# Altium PCB Bela_fan_control.PcbDoc
Units mil, origin at the board's own origin, x right, y up, seen from the top; angles counter-clockwise.
Board outline 760 x 1130 mil, 2 copper layers (Top Layer, Bottom Layer), stack 61.855 mil thick; 16 components, 21 nets, 72 pads, 0 vias.
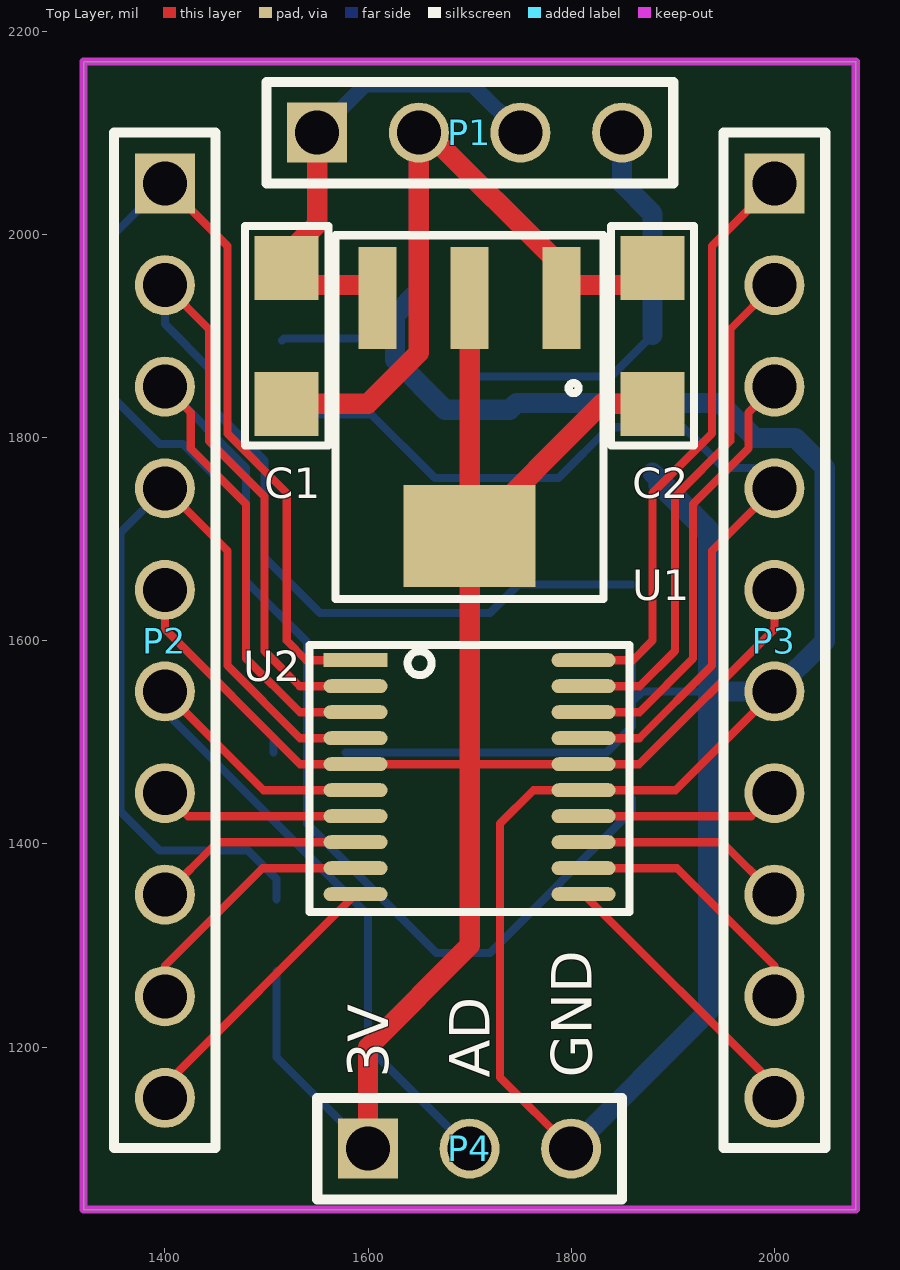
[diagram p0: Top Layer view]
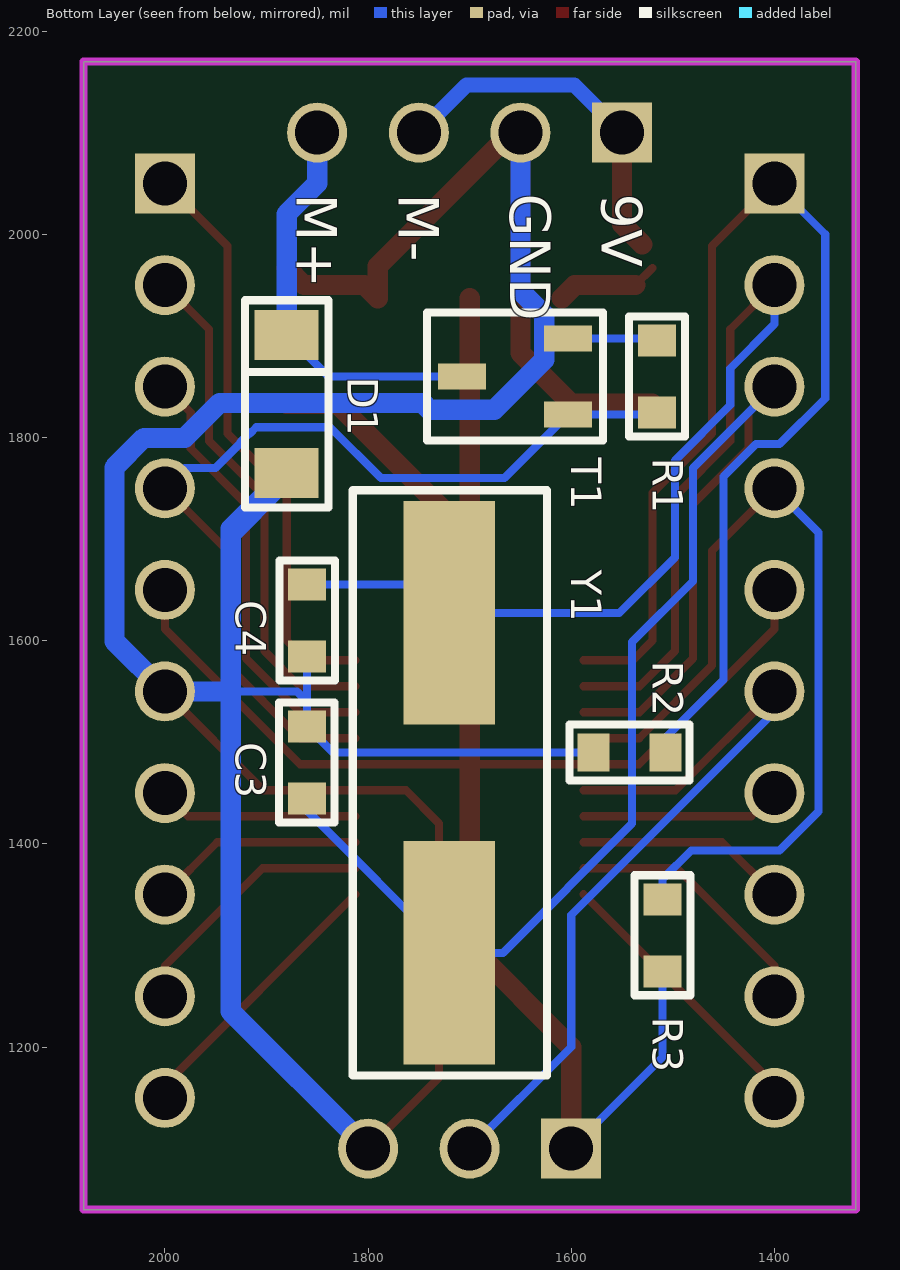
[diagram p1: Bottom Layer view, seen from below]

## Layer stack, top to bottom
Top Solder: solder mask 0.4, Solder Resist, Dk 3.5
Top Layer: signal copper 1.4
Dielectric1: core 59.0551, FR-4, Dk 4.2
Bottom Layer: signal copper 1.4
Bottom Solder: solder mask 0.4, Solder Resist, Dk 3.5

## Board outline
1320,1040 2080,1040 2080,2170 1320,2170

## Design rules (kind name [scope] priority, off if disabled: settings)
AssemblyTestPointUsage AssemblyTestPointUsage_1 [All] p1:
AssemblyTestPointUsage [All] p2:
AssemblyTestpoint AssemblyTestpoint_1 [All] p1: testpointundercomponent=TRUE minsize=40 maxsize=100 preferedsize=60 minholesize=0 maxholesize=40 preferedholesize=32 testpointgrid=1 usegrid=TRUE gridtolerance=0.01 allowsidetop=TRUE allowsidebottom=TRUE
AssemblyTestpoint [All] p2: testpointundercomponent=TRUE minsize=40 maxsize=100 preferedsize=60 minholesize=0 maxholesize=40 preferedholesize=32 testpointgrid=1 usegrid=TRUE gridtolerance=0.01 allowsidetop=TRUE allowsidebottom=TRUE
Clearance Clearance_to_ftdi_1 [InComponent('U1')] p1: gap=8
Clearance Clearance_1 [All] p2: gap=10
Clearance Clearance_to_ftdi [InComponent('U1')] p3: gap=8
Clearance [All] p4: gap=10
ComponentClearance ComponentClearance_1 [All] p1: gap=10 collisioncheckmode=3 verticalgap=10 showdistances=FALSE
ComponentClearance [All] p2: gap=10 collisioncheckmode=3 verticalgap=10 showdistances=FALSE
DiffPairsRouting DiffPairsRouting_1 [All] p1: maxlimit=10 minlimit=10 mostfreqgap=10 toplayer_minwidth=15 toplayer_maxwidth=15 toplayer_prefwidth=15 bottomlayer_minwidth=15 bottomlayer_maxwidth=15 bottomlayer_prefwidth=15 maxuncoupledlength=500
DiffPairsRouting [All] p2: maxlimit=10 minlimit=10 mostfreqgap=10 toplayer_minwidth=15 toplayer_maxwidth=15 toplayer_prefwidth=15 bottomlayer_minwidth=15 bottomlayer_maxwidth=15 bottomlayer_prefwidth=15 maxuncoupledlength=500
FabricationTestPointUsage FabricationTestPointUsage_1 [All] p1: valid=0 allowmultiple=FALSE
FabricationTestPointUsage [All] p2: valid=0 allowmultiple=FALSE
FabricationTestpoint FabricationTestpoint_1 [All] p1: side=3 testpointundercomponent=TRUE minsize=40 maxsize=100 preferedsize=60 minholesize=0 maxholesize=40 preferedholesize=32 testpointgrid=1 allowsidetop=TRUE allowsidebottom=TRUE usegrid=TRUE gridtolerance=0.01
FabricationTestpoint [All] p2: side=3 testpointundercomponent=TRUE minsize=40 maxsize=100 preferedsize=60 minholesize=0 maxholesize=40 preferedholesize=32 testpointgrid=1 allowsidetop=TRUE allowsidebottom=TRUE usegrid=TRUE gridtolerance=0.01
FanoutControl Fanout_Default_1 [All] p1: bgadir=Out bgaviamode=Centered fanoutstyle=Auto fanoutdirection=Alternating viagrid=1 // Fanout_Default (Default Rule)
FanoutControl Fanout_Small_1 [(CompPinCount < 5)] p2: bgadir=Out bgaviamode=Centered fanoutstyle=Auto fanoutdirection=OutThenIn viagrid=1 // Fanout_Small (Default Rule)
FanoutControl Fanout_SOIC_1 [IsSOIC] p3: bgadir=Out bgaviamode=Centered fanoutstyle=Auto fanoutdirection=Alternating viagrid=1 // Fanout_SOIC (Default Rule)
FanoutControl Fanout_LCC_1 [IsLCC] p4: bgadir=Out bgaviamode=Centered fanoutstyle=Auto fanoutdirection=Alternating viagrid=1 // Fanout_LCC (Default Rule)
FanoutControl Fanout_BGA_1 [IsBGA] p5: bgadir=Out bgaviamode=Centered fanoutstyle=Auto fanoutdirection=Alternating viagrid=1 // Fanout_BGA (Default Rule)
FanoutControl Fanout_BGA [IsBGA] p6: bgadir=Out bgaviamode=Centered fanoutstyle=Auto fanoutdirection=Alternating viagrid=1 // Fanout_BGA (Default Rule)
FanoutControl Fanout_LCC [IsLCC] p7: bgadir=Out bgaviamode=Centered fanoutstyle=Auto fanoutdirection=Alternating viagrid=1 // Fanout_LCC (Default Rule)
FanoutControl Fanout_SOIC [IsSOIC] p8: bgadir=Out bgaviamode=Centered fanoutstyle=Auto fanoutdirection=Alternating viagrid=1 // Fanout_SOIC (Default Rule)
FanoutControl Fanout_Small [(CompPinCount < 5)] p9: bgadir=Out bgaviamode=Centered fanoutstyle=Auto fanoutdirection=OutThenIn viagrid=1 // Fanout_Small (Default Rule)
FanoutControl Fanout_Default [All] p10: bgadir=Out bgaviamode=Centered fanoutstyle=Auto fanoutdirection=Alternating viagrid=1 // Fanout_Default (Default Rule)
Height Height_1 [All] p1: minheight=0 maxheight=1000 prefheight=500
Height [All] p2: minheight=0 maxheight=1000 prefheight=500
HoleSize HoleSize_1 [All] p1: absolutevalues=TRUE maxlimit=196.85 minlimit=0.98 maxpercent=80.000 minpercent=20.000
HoleSize [All] p2: absolutevalues=TRUE maxlimit=196.85 minlimit=0.98 maxpercent=80.000 minpercent=20.000
HoleToHoleClearance HoleToHoleClearance_1 [All] p1: gap=10 allowstackedmicrovias=TRUE
HoleToHoleClearance [All] p2: gap=10 allowstackedmicrovias=TRUE
LayerPairs LayerPairs_1 [All] p1: enforce=TRUE
LayerPairs [All] p2: enforce=TRUE
MinimumSolderMaskSliver MinimumSolderMaskSliver_to_ftdi_1 [InComponent('U1')   or InComponent('SW1') vs InComponent('U1')   or InComponent('SW1')] p1: minsoldermaskwidth=1
MinimumSolderMaskSliver MinimumSolderMaskSliver_1 [All] p2: minsoldermaskwidth=10
MinimumSolderMaskSliver MinimumSolderMaskSliver_to_ftdi [InComponent('U1')   or InComponent('SW1') vs InComponent('U1')   or InComponent('SW1')] p3: minsoldermaskwidth=1
MinimumSolderMaskSliver [All] p4: minsoldermaskwidth=10
NetAntennae NetAntennae_1 [All] p1: netantennaetolerance=0
NetAntennae [All] p2: netantennaetolerance=0
PasteMaskExpansion PasteMaskExpansion_1 [All] p1: expansion=0
PasteMaskExpansion [All] p2: expansion=0
PlaneClearance PlaneClearance_1 [All] p1: clearance=20
PlaneClearance [All] p2: clearance=20
PlaneConnect PlaneConnect_1 [All] p1: planeconnectstyle=Relief reliefexpansion=20 reliefentries=4 reliefconductorwidth=10 reliefairgap=10
PlaneConnect [All] p2: planeconnectstyle=Relief reliefexpansion=20 reliefentries=4 reliefconductorwidth=10 reliefairgap=10
PolygonConnect PolygonConnect_1 [All] p1: connectstyle=Relief reliefconductorwidth=10 reliefentries=4 polygonreliefangle="90 Angle" airgapwidth=10
PolygonConnect [All] p2: connectstyle=Relief reliefconductorwidth=10 reliefentries=4 polygonreliefangle="90 Angle" airgapwidth=10
RoutingCorners RoutingCorners_1 [All] p1: cornerstyle=45-Degree minsetback=100 maxsetback=100
RoutingCorners [All] p2: cornerstyle=45-Degree minsetback=100 maxsetback=100
RoutingLayers RoutingLayers_1 [All] p1: top layer_v5=TRUE bottom layer_v5=TRUE
RoutingLayers [All] p2: top layer_v5=TRUE bottom layer_v5=TRUE
RoutingPriority RoutingPriority_1 [All] p1: routingpriority=0
RoutingPriority [All] p2: routingpriority=0
RoutingTopology RoutingTopology_1 [All] p1: topology=Shortest
RoutingTopology [All] p2: topology=Shortest
RoutingVias RoutingVias_1 [All] p1: holewidth=28 width=50 viastyle="Through Hole" minholewidth=28 minwidth=50 maxholewidth=28 maxwidth=50
RoutingVias [All] p2: holewidth=28 width=50 viastyle="Through Hole" minholewidth=28 minwidth=50 maxholewidth=28 maxwidth=50
ShortCircuit ShortCircuit_1 [All] p1: allowed=FALSE
ShortCircuit [All] p2: allowed=FALSE
SilkToBoardRegionClearance SilkToBoardRegionClearance_1 [All] p1:
SilkToBoardRegionClearance [All] p2:
SilkToSilkClearance SilkToSilkClearance_1 [All] p1: silktosilkclearance=0
SilkToSilkClearance [All] p2: silktosilkclearance=0
SilkToSolderMaskClearance SilkToSolderMaskClearance_1 [IsPad] p1: minsilkscreentomaskgap=0 clearancetoexposedcopper=TRUE
SilkToSolderMaskClearance [IsPad] p2: minsilkscreentomaskgap=0 clearancetoexposedcopper=TRUE
SolderMaskExpansion SolderMaskExpansion_1 [All] p1: expansion=4
SolderMaskExpansion [All] p2: expansion=4
UnRoutedNet UnRoutedNet_1 [All] p1:
UnRoutedNet [All] p2:
UnpouredPolygon UnpouredPolygon_1 [All] p1:
UnpouredPolygon [All] p2:
Width Width_1 [All] p1: maxlimit=100 minlimit=8 preferedwidth=10
Width [All] p2: maxlimit=100 minlimit=8 preferedwidth=10

## Components (designator, comment, footprint, x,y, rotation, side; value= is the part's Value field where it differs from the comment)
C1 "10uF" FP_1206_CAP_085 1520,1900 r90 top
C2 "10uF" FP_1206_CAP_085 1880,1900 r270 top
C3 "20pF" FP_0603_CAP_080 1860,1480 r270 bottom
C4 "20pF" FP_0603_CAP_080 1860,1620 r90 bottom
D1 "TMMBAT46" SOD-80 1880,1833.07 r180 bottom
P1 "Header 1X4" HEADER_2.54MM_M_1x4 1700,2100 r0 top
P2 "Header 1X10" HEADER_2.54MM_M_1x10 1400,1600 r270 top
P3 "Header 1X10" HEADER_2.54MM_M_1x10 2000,1600 r270 top
P4 "Header 1X3" HEADER_2.54MM_M_1x3 1700,1100 r0 top
R1 "1K" FP_0603_RES 1515.43,1860 r90 bottom
R2 "1K" FP_0603_RES 1542.52,1490 r0 bottom
R3 "1K" FP_0603_RES 1510,1310 r270 bottom
T1 "NCE6003" FET_SOT23 1655.43,1860 r180 bottom
U1 "LD1117xx" SUPPLY_SOT223 1700,1820 r270 top
U2 "STM32F030F4P6" uC_TSSOP20 1700,1440 r0 top
Y1 "8MHz" FP_CRYSTAL_HC49_SMD 1720,1460 r270 bottom

## Footprints (in the part's own frame and the unit in brackets; to place one, negate y for a bottom-side part, rotate by r counter-clockwise, add the part's x,y. Pads: shape width x height; smd on the part's side, far side on the other; paste and mask are expansions set on the pad)
FET_SOT23 [mm] "SOT23-3 tok"
  rect 1.2x0.65 smd: D(-1.327,0) G(1.327,-0.95) S(1.327,0.95)
  silkscreen extent -2.2,-1.6 2.2,1.6, body extent -1.27,-1.46 1.27,1.46, height 0.97
FP_0603_CAP_080 [mm] "0.8mm magas 0603 kapacitás"
  rect 0.8x0.95 smd: 1(-0.9,0) 2(0.9,0)
  silkscreen extent -1.5,-0.7 1.5,0.69, body extent -0.8,-0.4 0.76,0.4, height 0.8
FP_0603_RES [mm] "0603 ellenállás"
  rect 0.8x0.95 smd: 1(-0.9,0) 2(0.9,0)
  silkscreen extent -1.5,-0.7 1.5,0.7, body extent -0.8,-0.4 0.8,0.4, height 0.44
FP_1206_CAP_085 [mm] "1206 kapacitás 0.85 mm"
  rect 1.6x1.6 smd: 1(-1.7,0) 2(1.7,0)
  silkscreen extent -2.74,-1.04 2.74,1.04, body extent -1.52,-0.79 1.58,0.79, height 0.85
FP_CRYSTAL_HC49_SMD [mil] "HC49/SMD"
  rect 220x90 smd: 1(-167.32,0) 2(167.32,0)
  silkscreen extent -288,-95 288,96, body extent -249,-90 240,90, height 130
HEADER_2.54MM_M_1x3 [mm] "3×1 tüskesor"
  rect 1.5x1.5 hole 1.1: 1(-2.54,0)
  round 1.5 hole 1.1: 2(0,0) 3(2.54,0)
  silkscreen extent -3.81,-1.27 3.81,1.27, body extent -3.78,-1.27 3.79,1.27, height 8.54
HEADER_2.54MM_M_1x4 [mm] "4×1 tüskesor"
  rect 1.5x1.5 hole 1.1: 1(-3.81,0)
  round 1.5 hole 1.1: 2(-1.27,0) 3(1.27,0) 4(3.81,0)
  silkscreen extent -5.08,-1.27 5.09,1.27, body extent -5.05,-1.27 5.06,1.27, height 8.54
HEADER_2.54MM_M_1x10 [mm] "2×1 tüskesor"
  rect 1.5x1.5 hole 1.1: 1(-11.43,0)
  round 1.5 hole 1.1: 2(-8.89,0) 3(-6.35,0) 4(-3.81,0) 5(-1.27,0) 6(1.27,0) 7(3.81,0) 8(6.35,0) 9(8.89,0) 10(11.43,0)
  silkscreen extent -12.7,-1.27 12.68,1.27, body extent -12.67,-1.27 12.68,1.27, height 8.54
SOD-80 [mm]
  rect 1.6x1.25 smd: A(0,-1.725) K(0,1.725)
  silkscreen extent -1.04,-2.59 1.04,2.59, body extent -0.79,-1.85 0.81,1.85, height 1.61
SUPPLY_SOT223 [mm] "SOT223 package, 3 leads"
  rect 2.55x0.95 smd: 1(-2.975,2.3) 2(-2.975,0) 3(-2.975,-2.3)
  rect 2.55x3.3 smd: 2(2.975,0)
  silkscreen extent -4.55,-3.35 4.55,3.35, body extent -3.5,-3.25 3.5,3.25, height 1.65
uC_TSSOP20 [mm]
  rect 1.6x0.35 smd: 1(-2.85,3.575)
  oval 1.6x0.35 smd: 2(-2.85,2.925) 3(-2.85,2.275) 4(-2.85,1.625) 5(-2.85,0.975) 6(-2.85,0.325) 7(-2.85,-0.325) 8(-2.85,-0.975) 9(-2.85,-1.625) 10(-2.85,-2.275) 11(2.85,-2.275) 12(2.85,-1.625) 13(2.85,-0.975) 14(2.85,-0.325) 15(2.85,0.325) 16(2.85,0.975) 17(2.85,1.625) 18(2.85,2.275) 19(2.85,2.925) 20(2.85,3.575)
  silkscreen extent -4,-2.72 4,3.95, body extent -3.1,-2.72 3.18,3.78, height 1.09

## Part data
C1 C2: library part Cap, "Capacitor ceramic X7R"
C3 C4: library part Cap, "Capacitor"
D1: library part DIODE_big
P1: "Header, 4-Pin"
P2 P3: "Header, 10-Pin"
P4: "Header, 3-Pin"
R1 R2 R3: library part RES, "Resistor"
T1: library part NMOS, "N Channel 60V 3A 2V @ 250uA 105 m? @ 3A,10V 1.7W SOT-23(SOT-23-3) MOSFET RoHS"
U1: "LD1117xx 3,3V lin reg"
Y1: library part XTAL, "Quartz"

## Nets (pads, with @x,y where several pads share a name; then routed paths per layer and width w, separated by ;. In a path a pad name is that pad's centre, name@x,y a point inside that pad or via, vN(x,y) a via of type N, cw(c..) or ccw(c..) an arc to the next point about the centre after c; other vN are vias at no path point)
3V3: C2.2 P2.5 P3.5 P4.1 R3.2 U1.2 U2.5 U2.16 | length 2051.5
  Top Layer w8: 1400,1620 1400,1611.56 1533.17,1478.39 U2.5 1700,1478.39 U2.16 1866.83,1478.39 2000,1611.56 2000,1620
  Top Layer w20: P4.1 1600,1200 1700,1300 1700,1478.39 U1.2@1700,1702.87 ; U1.2@1700,1937.13 U1.2@1700,1702.87 ; C2.2 1830.2,1833.07 U1.2@1700,1702.87
  Bottom Layer w8: R3.2 1510,1190 P4.1
9V: C1.2 P1.1 P1.3 U1.3 | length 439
  Top Layer w8: C1.2 C1.2@1536.93,1950
  Top Layer w20: C1.2@1530,1990 1550,2010 P1.1@1550,2080 ; C1.2@1536.93,1950 1596.57,1950 U1.3
  Bottom Layer w15: P1.1 1597.03,2147.03 1702.97,2147.03 P1.3
A/D: P2.6 P4.2 U2.6 | length 802.3
  Top Layer w8: P2.6 1497.2,1452.8 U2.6
  Bottom Layer w8: P2.6 1400,1530 1600,1330 1600,1200 P4.2
BOOT0: P2.1 R2.1 U2.1 | length 1234.8
  Top Layer w8: P2.1 1461.53,1988.47 1461.53,1803.93 1520,1745.46 1520,1600 1539.25,1580.75 U2.1
  Bottom Layer w8: P2.1 1350,2000 1350,1838.44 1394.92,1793.53 1418.03,1793.53 1450,1761.56 1450,1561.56 1507.09,1504.47 R2.1
GND: C1.1 C2.1 C3.1 C4.1 D1.A P1.2 P3.6 P4.3 R1.2 R2.2 T1.S U1.1 U2.15 | length 3742.7
  Top Layer w8: P1.2@1650,2080 P1.2 ; P4.3 1730,1170 1730,1420 1762.8,1452.8 U2.15 1902.8,1452.8 P3.6
  Top Layer w20: C1.1 1599.75,1833.07 1650,1883.32 P1.2@1650,2077.68 ; P1.2 1659,2100 1790.55,1968.45 U1.1 1803.43,1950 1863.07,1950 C2.1
  Bottom Layer w8: R1.2 1517.4,1897.4 T1.S ; R2.2 1834.57,1490 C3.1 1860,1540 ; C4.1 1860,1540 ; D1.A 1880,1751.46 1935,1696.46 ; 1935,1550 1870,1550 1860,1540
  Bottom Layer w20: P1.2 1650,1944.21 1626.59,1920.81 1626.59,1876.38 1675.77,1827.2 1739.58,1827.2 1746.38,1834 1945.96,1834 1980.43,1799.53 2020.52,1799.53 2049.53,1770.51 2049.53,1599.53 P3.6 1935,1550 ; P4.3 1935,1235 1935,1550 ; D1.A 1935,1710.16 1935,1696.46 1935,1550
NetD1_K: D1.K P1.4 T1.D | length 400.7
  Bottom Layer w8: T1.D 1839.02,1860 D1.K
  Bottom Layer w20: P1.4 1850,2050 1880,2020 D1.K
NetP2_7: P2.7 U2.7 | length 197.2
  Top Layer w8: P2.7 1422.8,1427.2 U2.7
NetP2_8: P2.8 U2.8 | length 209.2
  Top Layer w8: P2.8 1451.61,1401.61 U2.8
NetP2_9: P2.9 U2.9 | length 257.6
  Top Layer w8: P2.9 1400,1280 1496.02,1376.02 U2.9
NetP2_10: P2.10 U2.10 | length 278.2
  Top Layer w8: P2.10 1400,1162.64 U2.10
NetP3_1: P3.1 U2.20 | length 575.5
  Top Layer w8: U2.20 1860.75,1580.75 1880,1600 1880,1745.46 1938.47,1803.93 1938.47,1988.47 P3.1
NetP3_2: P3.2 U2.19 | length 504.9
  Top Layer w8: U2.19 1867.23,1555.16 1902,1589.92 1902,1742 1956.47,1796.47 1956.47,1906.47 P3.2
NetP3_3: P3.3 U2.18 | length 430.4
  Top Layer w8: U2.18 1867.1,1529.57 1920,1582.47 1920,1734.54 1974.47,1789.02 1974.47,1824.47 P3.3
NetP3_7: P3.7 U2.14 | length 197.2
  Top Layer w8: U2.14 1977.2,1427.2 P3.7
NetP3_8: P3.8 U2.13 | length 209.2
  Top Layer w8: U2.13 1948.39,1401.61 P3.8
NetP3_9: P3.9 U2.12 | length 257.6
  Top Layer w8: U2.12 1903.98,1376.02 2000,1280 P3.9
NetP3_10: P3.10 U2.11 | length 278.2
  Top Layer w8: U2.11 2000,1162.64 P3.10
NRST: P2.4 R3.1 U2.4 | length 893
  Top Layer w8: P2.4 1461.53,1688.47 1461.53,1575.49 1533.04,1503.98 U2.4
  Bottom Layer w8: P2.4 1356.47,1706.47 1356.47,1431.97 1394.92,1393.53 1481.91,1393.53 1510,1365.43 R3.1
OSC_IN: C4.2 P2.2 U2.2 Y1.1 | length 1209.8
  Top Layer w8: P2.2 1443.53,1906.47 1443.53,1796.47 1498,1742 1498,1589.92 1532.77,1555.16 U2.2
  Bottom Layer w8: P2.2 1400,1911.56 1443.53,1868.03 1443.53,1831.97 ; 1443.51,1831.95 1498,1777.46 1498,1682 1552.68,1627.32 Y1.1 1748.11,1655.43 C4.2
OSC_OUT: C3.2 P2.3 U2.3 Y1.2 | length 1361
  Top Layer w8: P2.3 1425.53,1824.47 1425.53,1789.02 1480,1734.54 1480,1582.47 1532.9,1529.57 U2.3
  Bottom Layer w8: P2.3 1480,1770 1480,1658.51 1540,1598.51 1540,1420 1667.32,1292.68 Y1.2 1860,1432.68 C3.2
PWM: P3.4 R1.1 T1.G U2.17 | length 913.4
  Top Layer w8: U2.17 1866.96,1503.98 1938.47,1575.49 1938.47,1688.47 P3.4
  Bottom Layer w8: R1.1 1517.4,1822.6 T1.G 1665.79,1760 1787.4,1760 1837.4,1810 1910,1810 1916.24,1803.76 1917.3,1803.76 1925.5,1795.56 1925.5,1794.5 1950,1770 1980,1770 P3.4

## Keep-outs
Keep-Out Layer:
  the board outline again, w8

## Silkscreen, mask and mechanical layers (free items; w line width, h text height)
Top Overlay:
  text "3V" at 1620,1170 h40 r90
  text "AD" at 1720,1170 h40 r90
  text "GND" at 1820,1170 h40 r90
Bottom Overlay:
  text "9V" at 1570,2040 h40 r90
  text "GND" at 1660,2040 h40 r90
  text "M-" at 1770,2040 h40 r90
  text "M+" at 1870,2040 h40 r90